# Altium PCB nav_pcb.PcbDoc
Units mil, origin at the board's own origin, x right, y up, seen from the top; angles counter-clockwise.
Board outline 6000 x 3155 mil, 2 copper layers (Top Layer, Bottom Layer); 30 components, 0 nets, 122 pads, 0 vias.
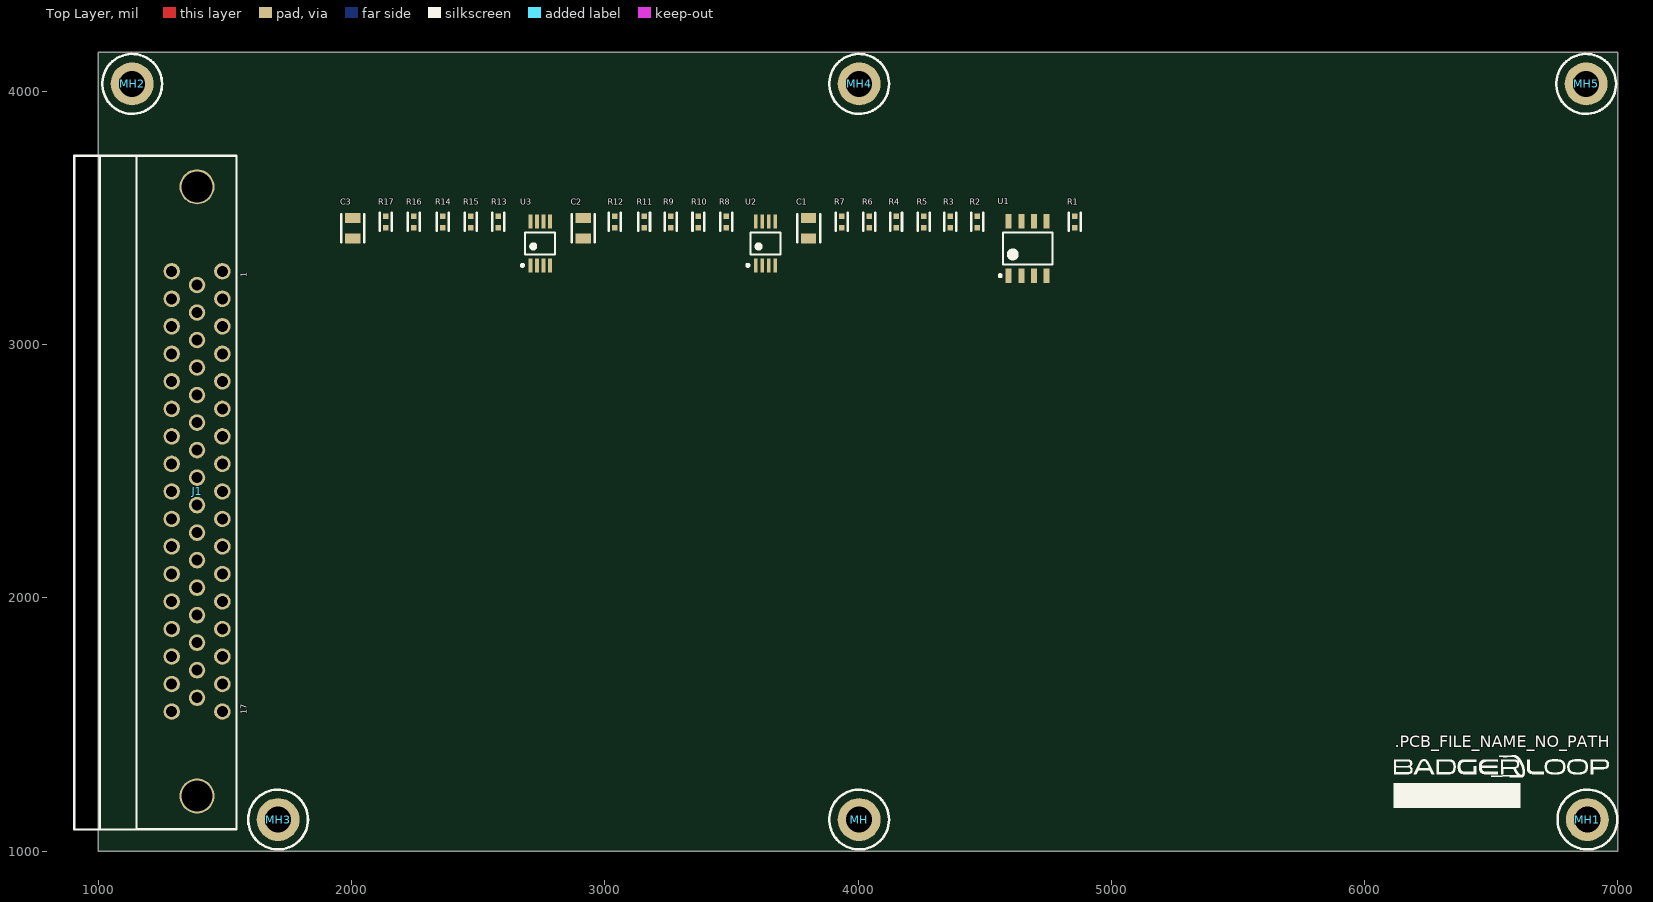
[diagram p0: Top Layer view]
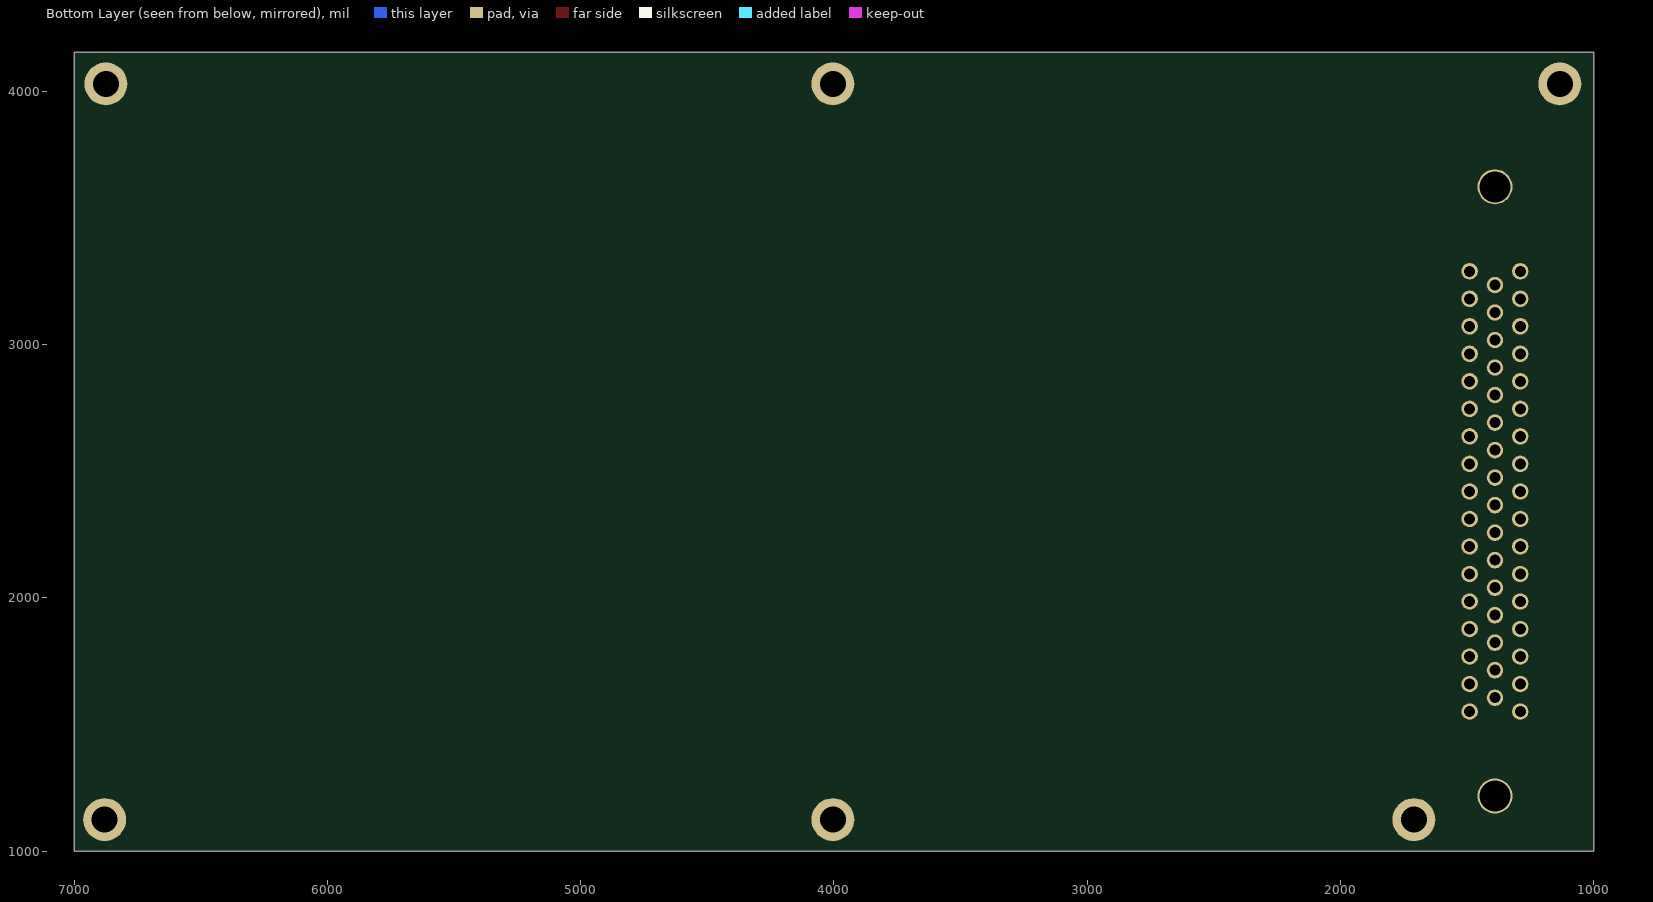
[diagram p1: Bottom Layer view, seen from below]

## Layer stack, top to bottom
Top Solder: solder mask 0.4, Solder Resist, Dk 3.5
Top Layer: signal copper 1.4
Dielectric 1: dielectric 12.6, FR-4, Dk 4.8
Bottom Layer: signal copper 1.4
Bottom Solder: solder mask 0.4, Solder Resist, Dk 3.5

## Board outline
1000,1000 7000,1000 7000,4155 1000,4155

## Design rules (kind name [scope] priority, off if disabled: settings)
Clearance [All] p1: gap=10 ignorepadtopadclearanceinfootprint=FALSE except(0: Arc-Hole Track-Hole SMDPad-Hole THPad-Hole Via-Hole Fill-Hole Poly-Hole Region-Hole Text-Hole)
PolygonConnect [All] p1: connectstyle=Relief reliefconductorwidth=10 reliefentries=4 polygonreliefangle="90 Angle" airgapwidth=10
RoutingVias [All] p1: holewidth=28 width=50 viastyle="Through Hole" minholewidth=28 minwidth=50 maxholewidth=28 maxwidth=50
SolderMaskExpansion [All] p1: expansion=4
Width [All] p1: maxlimit=10 minlimit=10 preferedwidth=10
30 further rules are at their usual default settings.

## Components (designator, comment, footprint, x,y, rotation, side; value= is the part's Value field where it differs from the comment)
C1 "4.7µF" SMD-0805C 3805,3460 r0 top
C2 "1µF" SMD-0805C 2915,3460 r0 top
C3 "1µF" SMD-0805C 2005,3460 r0 top
J1 "Connector 50 - MALE" 050DSUB1.27-H96-MALE 1490,1551.42 r90 top locked
MH "4-40 Mount Hole" MH 4004.43,1125 r0 top
MH1 "4-40 Mount Hole" MH 6880,1125 r0 top
MH2 "4-40 Mount Hole" MH 1133.86,4030 r0 top
MH3 "4-40 Mount Hole" MH 1710,1125 r0 top
MH4 "4-40 Mount Hole" MH 4004.43,4030 r0 top
MH5 "4-40 Mount Hole" MH 6875,4030 r0 top
R1 "10k" SMD-0402-RES 4855,3485 r0 top
R2 "0.0" SMD-0402-RES 4470,3485 r0 top
R3 "0.0" SMD-0402-RES 4365,3485 r0 top
R4 "0.0" SMD-0402-RES 4150,3485 r0 top
R5 "0.0" SMD-0402-RES 4260,3485 r0 top
R6 "0.0" SMD-0402-RES 4045,3485 r0 top
R7 "10k" SMD-0402-RES 3935,3485 r0 top
R8 "0.0" SMD-0402-RES 3480,3485 r0 top
R9 "0.0" SMD-0402-RES 3260,3485 r0 top
R10 "0.0" SMD-0402-RES 3370,3485 r0 top
R11 "0.0" SMD-0402-RES 3155,3485 r0 top
R12 "0.0" SMD-0402-RES 3040,3485 r0 top
R13 "0.0" SMD-0402-RES 2580,3485 r0 top
R14 "0.0" SMD-0402-RES 2360,3485 r0 top
R15 "0.0" SMD-0402-RES 2470,3485 r0 top
R16 "0.0" SMD-0402-RES 2245,3485 r0 top
R17 "0.0" SMD-0402-RES 2135,3485 r0 top
U1 "I2C EEPROM" SOIC127P600X175-8N 4670,3380 r90 top
U2 "MCP9808" TSOP65P490X110-8N 3635,3400 r90 top
U3 "MCP9808" TSOP65P490X110-8N 2745,3400 r90 top

## Footprints (in the part's own frame and the unit in brackets; to place one, negate y for a bottom-side part, rotate by r counter-clockwise, add the part's x,y. Pads: shape width x height; smd on the part's side, far side on the other; paste and mask are expansions set on the pad)
050DSUB1.27-H96-MALE [mil] "Connector; D Subminiature; 96 Position; Right Angle; Pitch 1.27 mm"
  round 65 hole 43.31: 1(1738.58,0) 2(1629.92,0) 3(1521.26,0) 4(1412.6,0) 5(1303.94,0) 6(1195.28,0) 7(1086.61,0) 8(977.95,0) 9(869.29,0) 10(760.63,0) 11(651.97,0) 12(543.31,0) 13(434.65,0) 14(325.98,0) 15(217.32,0) 16(108.66,0) 17(0,0) 18(1684.25,100) 19(1575.62,100) 20(1466.98,100) 21(1358.35,100) 22(1249.71,100) 23(1141.08,100) 24(1032.44,100) 25(923.81,100) 26(815.17,100) 27(706.54,100) 28(597.9,100) 29(489.27,100) 30(380.63,100) 31(272,100) 32(163.36,100) 33(54.73,100) 34(1738.58,200) 35(1629.92,200) 36(1521.26,200) 37(1412.6,200) 38(1303.94,200) 39(1195.28,200) 40(1086.61,200) 41(977.95,200) 42(869.29,200) 43(760.63,200) 44(651.97,200) 45(543.31,200) 46(434.65,200) 47(325.98,200) 48(217.32,200) 49(108.66,200) 50(0,200)
  round 138 hole 122.05: 51(-333.46,100) 52(2072.05,100)
  silkscreen extent -465,-55 2195,585, body extent -454,-42 2184,817, height 547
MH [mm] "#10 Mount Hole"
  round 4.3 hole 2.6 unplated: 2(0,0)
  silkscreen extent -3,-3 3,3, body extent -2.32,-2.58 2.32,2.07, height 2.84
SMD-0402-RES [mm]
  rect 0.55x0.55 smd: 1(0,0.584) 2(0,-0.584)
  silkscreen extent -0.6,-0.9 0.6,0.9, body extent -0.28,-0.57 0.27,0.58, height 0.41
SMD-0805C [mil]
  rect 60x40 smd: 1(0,40) 2(0,-40)
  silkscreen extent -45,-55 45,55, body extent -25,-39 25,39, height 35
SOIC127P600X175-8N [mm] "SOIC, 8-Leads, Body 4.90x3.90mm, Pitch 1.27mm, IPC Medium Density"
  rect 1.45x0.6 smd: 1(-2.725,1.905) 2(-2.725,0.635) 3(-2.725,-0.635) 4(-2.725,-1.905) 5(2.725,-1.905) 6(2.725,-0.635) 7(2.725,0.635) 8(2.725,1.905)
  silkscreen extent -2.85,-2.5 1.6,2.88, body extent -2,-2.5 2,2.5, height 1.75
TSOP65P490X110-8N [mm] "TSOP, 8-Leads, Body 3.00x3.00mm, Pitch 0.65mm, IPC Medium Density"
  rect 1.4x0.375 smd: 1(-2.2,0.975) 2(-2.2,0.325) 3(-2.2,-0.325) 4(-2.2,-0.975) 5(2.2,-0.975) 6(2.2,-0.325) 7(2.2,0.325) 8(2.2,0.975)
  silkscreen extent -2.32,-1.5 1.1,1.9, body extent -2.45,-1.5 2.45,1.5, height 1.1

## Part data
C1: library part GCJ21BR71C475KA01L, "CAP CER 4.7UF 16V X7R 0805", Digi-Key Part Number=490-10557-1-ND, Manufacturer="Murata Electronics North America", Operating Temperature="-55°C ~ 125°C", Package / Case="0805 (2012 Metric)", Ratings=AEC-Q200, Temperature Coefficient=X7R, Tolerance=±10%, Voltage=16V, @ qty=0, Applications="Automotive, Boardflex Sensitive", Datasheets=http://www.murata.com/~/media/webrenewal/support/library/catalog/products/capacitor/mlcc/c03e.ashx, Factory Stock=0, Features="Soft Termination", Height - Seated (Max)=-, Image=//media.digikey.com/Renders/Murata%20Renders/0805%20(2012%20Metric)%20.85mm.jpg, Lead Spacing=-, Lead Style=-, Minimum Quantity=1, Mounting Type="Surface Mount, MLCC", Packaging="Cut Tape (CT)", Part Number=GCJ21BR71C475KA01L, Part Status=Active, Quantity Available=53217, Series=GCJ, Size / Dimension="0.079\" L x 0.049\" W (2.00mm x 1.25mm)", Thickness (Max)="0.057\" (1.45mm)", Unit Price (USD)=0.44
C2 C3: library part GCJ21BR71E105KA12L, "CAP CER 1UF 25V X7R 0805", Digi-Key Part Number=490-5802-1-ND, Manufacturer="Murata Electronics North America", Operating Temperature="-55°C ~ 125°C", Package / Case="0805 (2012 Metric)", Ratings=AEC-Q200, Temperature Coefficient=X7R, Tolerance=±10%, Voltage=25V, @ qty=0, Applications="Automotive, Boardflex Sensitive", Datasheets=http://www.murata.com/~/media/webrenewal/support/library/catalog/products/capacitor/mlcc/c03e.ashx, Factory Stock=0, Features="Soft Termination", Height - Seated (Max)=-, Image=//media.digikey.com/Renders/Murata%20Renders/0805%20(2012%20Metric)%20.85mm.jpg, Lead Spacing=-, Lead Style=-, Minimum Quantity=1, Mounting Type="Surface Mount, MLCC", Packaging="Cut Tape (CT)", Part Number=GCJ21BR71E105KA12L, Part Status=Active, Quantity Available=15950, Series=GCJ, Size / Dimension="0.079\" L x 0.049\" W (2.00mm x 1.25mm)", Thickness (Max)="0.057\" (1.45mm)", Unit Price (USD)=0.36
J1: "Receptacle Header Assemby", Manufacturer=HARTING, Manufacturer P/N=09665526616, Digikey Link=https://www.digikey.com/product-detail/en/harting/09665526616/1195-2568-ND/3181151, Digikey P/N=1195-2568-ND
R1 R7: library part ERJ-2GEJ103X, "RES SMD 10K OHM 5% 1/10W 0402", Digi-Key Part Number=P10KJCT-ND, Manufacturer="Panasonic Electronic Components", Operating Temperature="-55°C ~ 155°C", Package / Case="0402 (1005 Metric)", Power (Watts)="0.1W, 1/10W", Supplier Device Package=0402, Temperature Coefficient=±200ppm/°C, Tolerance=±5%, @ qty=1500, Composition="Thick Film", Datasheets=http://industrial.panasonic.com/www-cgi/jvcr13pz.cgi?E+PZ+3+AOA0001+ERJ2GEJ103X+7+WW, DNP=DNP, Factory Stock=0, Failure Rate=-, Features="Automotive AEC-Q200", Height - Seated (Max)="0.016\" (0.40mm)", Image=//media.digikey.com/Photos/Panasonic%20Photos/ERJ-PA2-Series.jpg, Minimum Quantity=1, Number of Terminations=2, Packaging="Cut Tape (CT)", Part Number=ERJ-2GEJ103X, Part Status=Active, Quantity Available=2560215, Series=ERJ, Size / Dimension="0.039\" L x 0.020\" W (1.00mm x 0.50mm)", Unit Price (USD)=0.00350
R2 R3 R4 R5 R6 R8 R9 R10 R11 R12 R13 R14 R15 R16 R17: library part ERJ-2GE0R00X, "RES SMD 0.0OHM JUMPER 1/10W 0402", Digi-Key Part Number=P0.0JCT-ND, Manufacturer="Panasonic Electronic Components", Operating Temperature="-55°C ~ 155°C", Package / Case="0402 (1005 Metric)", Power (Watts)="0.1W, 1/10W", Supplier Device Package=0402, Temperature Coefficient=-, Tolerance=Jumper, @ qty=1500, Composition="Thick Film", Datasheets=http://industrial.panasonic.com/www-cgi/jvcr13pz.cgi?E+PZ+3+AOA0001+ERJ2GE0R00X+7+WW, DNP=DNP, Factory Stock=0, Failure Rate=-, Features="Automotive AEC-Q200", Height - Seated (Max)="0.016\" (0.40mm)", Image=//media.digikey.com/Photos/Panasonic%20Photos/ERJ-PA2-Series.jpg, Minimum Quantity=1, Number of Terminations=2, Packaging="Cut Tape (CT)", Part Number=ERJ-2GE0R00X, Part Status=Active, Quantity Available=3152483, Series=ERJ, Size / Dimension="0.039\" L x 0.020\" W (1.00mm x 0.50mm)", Unit Price (USD)=0.00384
U1: "IC EEPROM 32K I2C 1MHZ 8SOIC", Manufacturer="ON Semi", Manufacturer P/N=CAT24C32WI-GT3, Digikey P/N=CAT24C32WI-Gt3CT-ND
U2 U3: "SENSOR DIGITAL -40C-125C 8MSOP", Manufacturer=Microchip, Datasheet=http://ww1.microchip.com/downloads/en/DeviceDoc/25095A.pdf, Digikey Link=https://www.digikey.com/product-detail/en/microchip-technology/MCP9808-E-MS/MCP9808-E-MS-ND/2802083, Digikey P/N=MCP9808-E/MS-ND, Manufacturer P/N=MCP9808

## Nets (pads, with @x,y where several pads share a name; then routed paths per layer and width w, separated by ;. In a path a pad name is that pad's centre, name@x,y a point inside that pad or via, vN(x,y) a via of type N, cw(c..) or ccw(c..) an arc to the next point about the centre after c; other vN are vias at no path point)
pads on no net: C1.1 C1.2 C2.1 C2.2 C3.1 C3.2 J1.1 J1.2 J1.3 J1.4 J1.5 J1.6 J1.7 J1.8 J1.9 J1.10 J1.11 J1.12 J1.13 J1.14 J1.15 J1.16 J1.17 J1.18 J1.19 J1.20 J1.21 J1.22 J1.23 J1.24 J1.25 J1.26 J1.27 J1.28 J1.29 J1.30 J1.31 J1.32 J1.33 J1.34 J1.35 J1.36 J1.37 J1.38 J1.39 J1.40 J1.41 J1.42 J1.43 J1.44 J1.45 J1.46 J1.47 J1.48 J1.49 J1.50 J1.51 J1.52 MH1.2 MH2.2 MH3.2 MH4.2 MH5.2 MH.2 R1.1 R1.2 R2.1 R2.2 R3.1 R3.2 R4.1 R4.2 R5.1 R5.2 R6.1 R6.2 R7.1 R7.2 R8.1 R8.2 R9.1 R9.2 R10.1 R10.2 R11.1 R11.2 R12.1 R12.2 R13.1 R13.2 R14.1 R14.2 R15.1 R15.2 R16.1 R16.2 R17.1 R17.2 U1.1 U1.2 U1.3 U1.4 U1.5 U1.6 U1.7 U1.8 U2.1 U2.2 U2.3 U2.4 U2.5 U2.6 U2.7 U2.8 U3.1 U3.2 U3.3 U3.4 U3.5 U3.6 U3.7 U3.8

## Silkscreen, mask and mechanical layers (free items; w line width, h text height)
Top Overlay:
  drawing of 11 lines, arcs and shapes, not listed
  text ".PCB_FILE_NAME_NO_PATH" at 6120,1395 h80
Mechanical 2:
  the board outline again, w10

## Text inside footprints (layer, text, board x,y; h text height)
J1: Top Overlay "17" at 1595,1541.42 h40 r90; Top Overlay "1" at 1595,3266.42 h40 r90